# Altium PCB PCB1.PcbDoc (part 2 of 2)
Units mm, origin at the board's own origin, x right, y up, seen from the top; angles counter-clockwise.
Board outline 30.3 x 30 mm, 4 copper layers (Top Layer, Layer 1, Layer 2, Bottom Layer), stack 1.52 mm thick; 94 components, 80 nets, 362 pads, 126 vias.
Unrouted connection lines stored in the file: 75.
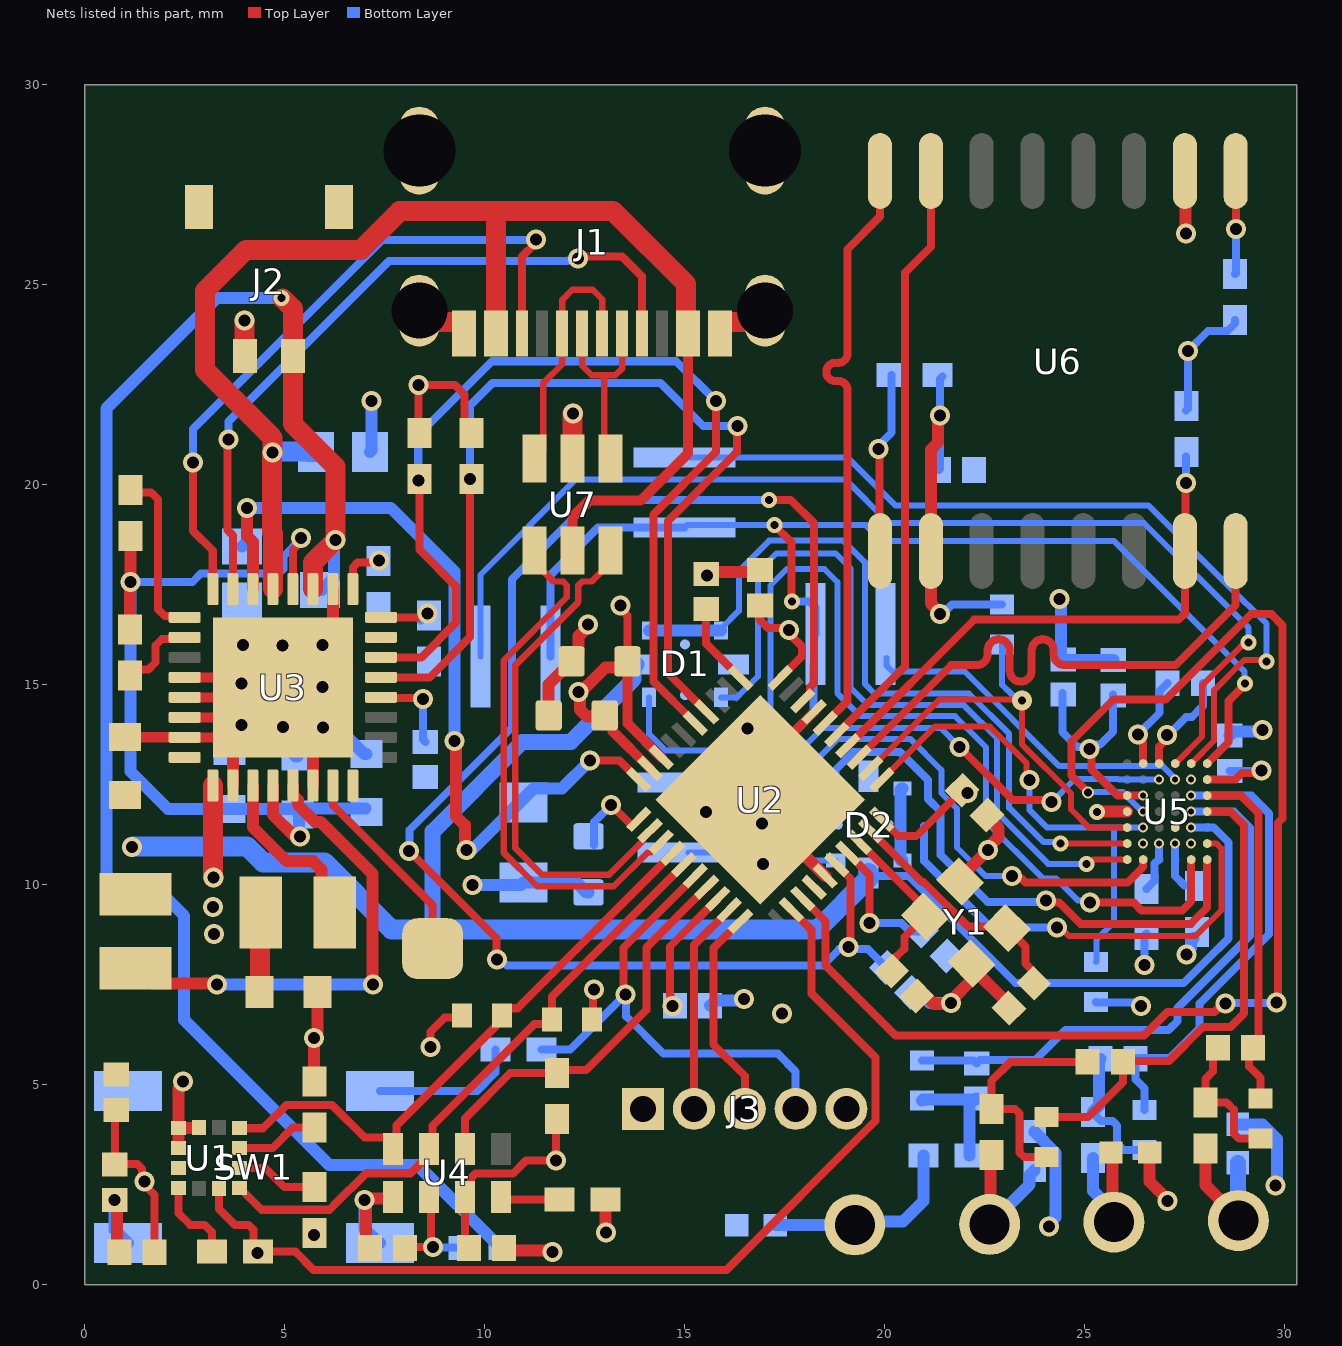
[diagram p4: the nets of this part, all layers, seen from the top]

## Via types
v1: diameter 0.5, hole 0.3, Top Layer to Bottom Layer, 101 vias
v2: diameter 0.25, hole 0.15, Top Layer to Bottom Layer, 13 vias
v3: diameter 0.4, hole 0.2, Top Layer to Bottom Layer, 10 vias
v4: diameter 0.5, hole 0.2, Top Layer to Bottom Layer, 1 vias
v5: diameter 0.3, hole 0.2, Top Layer to Bottom Layer, 1 vias

## Nets (pads, with @x,y where several pads share a name; then routed paths per layer and width w, separated by ;. In a path a pad name is that pad's centre, name@x,y a point inside that pad or via, vN(x,y) a via of type N, cw(c..) or ccw(c..) an arc to the next point about the centre after c; other vN are vias at no path point)
+1.8V_Acc: C1.2 C2.2 C3.1 C4.2 C5.2 C6.2 C7.2 C8.2 C9.2 C14.2 C16.2 C19.2 C21.2 C32.2 C33.2 C35.2 J3.1 L1.1 R4.1 R5.1 R11.2 R14.2 R15.2 R19.2 R20.2 R22.1 R24.1 R25.1 R26.2 R27.2 R28.2 U1.9 U1.10 U2.8 U2.9 U2.18 U2.30 U2.40 U3.1 U3.12 U4.7 U5.E5 U5.E6 U5.F1 U5.G4 U6.2 | length 65.9
  Top Layer w0.2: C1.2@0.785,4.372 0.753,4.34 C2.2@0.753,3.001 0.766,3.014 1.317,3.014 1.434,2.897 1.434,2.637 v1(1.492,2.579) 1.492,2.498 1.751,2.239 C3.1@1.751,0.809 ; U1.10@2.349,2.41 2.349,1.785 2.638,1.495 2.998,1.495 3.178,1.315 R14.2@3.178,0.826 ; U3.12@7.41,14.682 7.43,14.663 8.435,14.663 v1(8.454,14.643) ; R5.1@8.372,21.292 8.35,21.315 v1(8.35,22.488) 9.257,22.488 9.492,22.252 9.492,21.467 R4.1@9.666,21.294 ; v1(8.646,5.937) 8.646,6.321 8.999,6.674 9.377,6.674 R15.2@9.432,6.729 ; C32.2@9.607,0.915 9.505,1.018 U4.7@9.505,2.192 9.655,2.342 9.655,2.665 9.772,2.782 10.714,2.782 11.033,3.101 v1(11.781,3.101) 11.781,4.103 R24.1@11.815,4.136 ; R26.2@12.683,6.633 12.711,6.662 12.711,7.35 v1(12.74,7.378) ; v1(13.398,16.983) 13.398,16.901 13.571,16.728 C9.2@13.571,15.581 ; v1(14.699,6.971) 14.641,7.029 14.641,7.235 14.638,7.238 14.638,8.459 U2.18@15.831,9.651 ; C8.2@16.883,16.982 16.881,16.98 16.881,16.619 17.082,16.418 17.551,16.418 v1(17.608,16.361) 17.608,16.28 17.931,15.956 17.931,15.711 U2.40@17.386,15.166 ; U2.30@19.931,11.631 20.351,11.212 20.789,11.212 C21.2@21.937,12.36 22.01,12.36 v1(22.077,12.293) ; v1(25.117,13.387) 25.174,13.33 25.174,12.875 25.823,12.227 U5.E6@26.063,12.227 v2(26.463,12.227) ; U5.G4@26.863,13.027 26.863,13.457 27.064,13.658 v1(27.064,13.739) ; U5.F1@28.063,12.627 28.766,12.627 28.933,12.795 29.367,12.795 v1(29.424,12.852)
  Top Layer w0.254: C14.2@13.201,14.026 13.201,13.836 U2.9@14.134,12.903 ; C9.2@13.571,15.581 13.571,14.032 U2.8@14.417,13.186
  Top Layer w0.3: C14.2@13.201,14.026 13.028,14.2 12.559,14.2 12.383,14.376 12.383,14.777 v1(12.345,14.815) 12.399,14.815 12.544,14.961 12.553,14.961 13.018,15.425 13.416,15.425 C9.2@13.571,15.581 ; v1(21.378,21.726) 21.34,21.688 21.34,21.06 21.157,20.876 U6.2@21.157,18.341 21.157,17.029 21.386,16.8 v1(21.386,16.761)
  Top Layer w0.5: U3.1@3.205,12.477 3.205,10.188 v1(3.22,10.173) ; C19.2@4.372,7.322 4.387,7.338 4.387,9.293 L1.1@4.402,9.308
  Bottom Layer w0.2: v1(8.454,14.643) 8.454,13.63 C16.2@8.519,13.565 ; v1(14.699,6.971) C35.2@14.758,6.973 C35.2@14.758,6.973 ; C33.2@21.353,20.366 21.378,20.391 21.378,22.636 R19.2@21.446,22.703 ; v1(21.386,16.761) 21.44,16.761 21.683,17.004 R28.2@22.934,17.004 ; C5.2@24.449,14.796 24.449,13.81 24.815,13.445 25.06,13.445 v1(25.117,13.387) ; v1@25.099,13.405 25.216,13.405 25.31,13.499 25.383,13.499 25.707,13.823 C7.2@25.707,14.752 ; R27.2@25.28,7.061 25.286,7.054 26.267,7.054 26.358,6.963 v1(26.412,6.963) ; v1(26.5,7.986) 26.5,8.739 R11.2@26.545,8.783 ; v1(27.064,13.739) 27.089,13.739 27.536,14.186 27.678,14.186 27.956,14.463 C4.2@27.956,15.039 ; R20.2@27.539,21.859 27.582,21.901 v1(27.582,23.338) 28.079,23.835 28.565,23.835 28.765,24.035 R25.1@28.765,24.11 ; C6.2@28.626,12.847 29.419,12.847 v1(29.424,12.852)
  other v1: 5.73,1.244 3.24,8.76 3.214,9.445
+5V: C17.2 J1.A4-B9 J1.B4-A9 U3.21 U7.5 | length 34.6
  Top Layer w0.254: U7.5@12.2,18.35 12.2,19.2 12.6,19.6 13.9,19.6 15.087,20.787 J1.A4-B9@15.087,23.775 J1.A4-B9@15.037,23.825
  Top Layer w0.5: U3.21@4.705,17.387 4.705,18.779 4.684,18.8 4.684,20.784 v1(4.7,20.8) 4.7,21.172 3.003,22.869 3.003,24.842 4.031,25.87 6.91,25.87 7.876,26.837 10.287,26.837 ; J1.B4-A9@10.287,23.775 10.287,26.837 ; J1.A4-B9@15.037,23.825 15.037,25.014 13.215,26.837 10.287,26.837
  Bottom Layer w0.5: v1(4.7,20.8) 4.727,20.827 5.582,20.827 5.595,20.814 C17.2@5.782,20.814
BIOZ1: C29.1 R10.1 U5.D2 | length 14.1
  Bottom Layer w0.2: R10.1@20.94,5.606 22.225,5.606 C29.1@22.299,5.532 22.379,5.613 23.765,5.613 24.516,6.364 27.098,6.364 27.319,6.585 27.319,6.916 29.135,8.732 29.135,11.42 28.728,11.827 v2(27.663,11.827)
BIOZ2: C28.1 R9.1 U5.E2 | length 11.5
  Bottom Layer w0.2: R9.1@26.501,4.368 26.501,4.906 26.272,5.134 26.272,5.667 27.131,5.667 27.875,6.41 27.875,7.024 29.612,8.761 29.612,11.78 29.165,12.227 v2(27.663,12.227)
BIOZ3: C31.1 R16.1 U5.D1 | length 12.1
  Top Layer w0.2: R16.1@24.045,4.187 25.082,4.187 25.957,5.061 C31.1@25.957,5.569 25.977,5.589 27.106,5.589 27.952,6.435 27.961,6.435 27.969,6.443 28.646,6.443 28.982,6.78 28.982,11.486 28.641,11.827 U5.D1@28.063,11.827
BIOZ4: C30.1 R17.1 U5.E1 | length 8.8
  Top Layer w0.2: U5.E1@28.063,12.227 28.906,12.227 29.341,11.792 29.341,6.138 29.112,5.91 29.112,5.459 29.399,5.172 29.399,4.656 R17.1@29.4,4.655
CC1: J1.A5 U3.23 | length 18
  Top Layer w0.203: v1(3.594,21.132) 3.569,21.107 3.569,18.862 3.705,18.726 U3.23@3.705,17.387 ; v1(12.339,25.657) 12.39,25.708 13.438,25.708 13.937,25.208 J1.A5@13.937,23.775
  Bottom Layer w0.203: v1(3.594,21.132) 3.594,21.582 7.607,25.595 12.072,25.595 12.077,25.6 12.283,25.6 v1(12.339,25.657)
CC2: J1.B5 U3.24 | length 17.3
  Top Layer w0.203: v1(2.713,20.553) 2.713,18.84 3.203,18.35 3.203,17.39 U3.24@3.205,17.387 ; J1.B5@10.937,23.775 10.937,25.703 11.289,26.055 v1(11.289,26.135)
  Bottom Layer w0.203: v1(2.713,20.553) 2.713,21.389 7.44,26.117 11.271,26.117 v1(11.289,26.135)
DEC4_6: C20.2 U2.26 U2.38 | length 37.1
  Top Layer w0.2: v1(8.113,10.843) 10.291,8.665 v1@10.291,8.123 ; v3@17.081,19.621 17.649,19.621 18.231,19.039 18.231,15.033 18.129,14.931 18.129,14.778 U2.38@17.951,14.601 ; U2.26@18.8,10.5 18.8,10.497 19.152,10.145 19.152,8.584 19.094,8.526 v1(19.094,8.444)
  Bottom Layer w0.2: v1(8.113,10.843) 8.116,10.845 8.116,11.362 10.678,13.924 10.678,17.631 12.669,19.621 v3(17.105,19.621) ; v1(10.314,8.134) 10.395,8.134 10.555,7.974 18.452,7.974 18.865,8.387 19.036,8.387 v1(19.094,8.444) 19.151,8.387 19.585,8.387 20.042,7.931 C20.2@20.045,7.931
GND: C1.1 C2.1 C3.2 C4.1 C5.1 C6.1 C7.1 C8.1 C9.1 C10.1 C11.1 C14.1 C15.1 C16.1 C17.1 C18.1 C19.1 C20.1 C21.1 C22.1 C23.1 C24.1 C25.1 C26.1 C27.1 C32.1 C33.1 C34.1 C35.1 C36.1 C37.1 D5.1 D6.1 D7.1 D8.1 J1.1 J1.2 J1.3 J1.4 J1.A1-B12 J1.B1-A12 J2.2 J2.3 J2.4 J3.5 R3.2 R6.1 R7.1 R21.1 R23.1 SW1.3 SW1.4 U1.6 U1.7 U1.8 U2.25 U2.37 U2.41 U3.2 U3.6 U3.18 U3.28 U3.29 U3.30 U3.31 U3.33 U4.5 U5.B2 U5.B5 U5.D6 U5.F2 U5.G5 U6.10 U7.2 Y1.2 Y1.4 | length 69.8
  Top Layer w0.2: v1(26.336,13.759) 26.336,13.678 26.463,13.55 U5.G5@26.463,13.027
  Top Layer w0.254: C26.1@1.009,13.686 1.011,13.684 2.498,13.684 U3.31@2.5,13.682 U3.33@3.705,13.682 ; U3.30@2.5,14.182 3.332,14.182 U3.33@3.769,14.619 ; U3.29@2.5,14.682 U3.33@3.705,14.682 ; U3.28@2.5,15.182 U3.33@3.925,15.182 ; U2.41@16.891,12.126 16.891,12.975 U2.37@18.234,14.318
  Top Layer w0.3: v1(0.749,2.119) 0.812,2.055 0.812,0.868 C3.2@0.871,0.809 ; U1.8@2.349,3.41 U1.7@2.349,3.91 ; v1(2.459,5.082) 2.459,5.028 2.349,4.918 U1.7@2.349,3.91 ; U1.6@2.862,3.923 2.855,3.916 2.355,3.916 U1.7@2.349,3.91 ; U3.2@3.705,12.477 U3.33@3.705,13.682 ; U3.33@4.955,14.932 5.705,14.182 U3.6@5.705,12.477 ; R3.2@5.746,5.077 5.738,5.085 5.738,6.16 v1(5.729,6.169) 5.729,6.223 5.822,6.316 C19.1@5.822,7.322 ; U3.33@5.976,15.953 6.205,16.182 U3.18@6.205,17.387 ; C34.1@7.134,0.915 7.039,1.01 7.039,2.076 v1(7.001,2.115) 7.039,2.153 7.666,2.153 U4.5@7.705,2.192 ; C32.1@10.487,0.915 10.545,0.857 11.663,0.857 v1(11.701,0.819) ; C14.1@11.598,14.229 11.598,15.007 11.941,15.351 11.991,15.351 12.171,15.531 C9.1@12.171,15.581 12.352,15.761 12.352,16.217 12.58,16.445 v1(12.58,16.499) ; R23.1@13.025,2.13 13.027,2.128 v1(13.028,1.302) v1(13.028,1.302) ; v1(15.563,17.724) 15.563,17.744 C10.1@15.535,17.771 15.581,17.817 16.838,17.817 C8.1@16.883,17.862 ; U2.41@16.891,12.126 16.891,11.843 U2.25@18.517,10.217 ; C37.1@20.797,7.212 20.811,7.227 21.023,7.227 21.237,7.013 21.627,7.013 v1(21.655,7.04) 21.655,7.092 22.206,7.644 22.206,7.997 Y1.2@22.171,8.033 22.171,7.94 23.105,7.006 C36.1@23.105,6.913 ; Y1.4@21.888,10.083 21.888,10.172 v1(22.579,10.863) 22.579,10.917 22.846,11.184 22.846,11.422 22.559,11.708 C21.1@22.559,11.737 ; v3@25.309,11.827 U5.D6@26.063,11.827 ; D6.1@26.624,3.303 26.624,2.574 27.066,2.132 v1(27.066,2.087) ; U6.10@27.507,27.841 27.522,27.825 27.522,26.297 v1(27.537,26.282)
  Top Layer w0.5: v1(3.997,24.104) 3.997,23.225 J2.2@4.003,23.22 ; J1.2@8.367,24.35 8.367,24.293 8.598,24.063 9.437,24.063 9.487,24.013 J1.B1-A12@9.487,23.775 ; U7.2@12.2,20.65 12.2,21.776 v1(12.208,21.783) ; J1.A1-B12@15.887,23.775 15.887,24.013 15.937,24.063 16.776,24.063 17.007,24.293 J1.1@17.007,24.35
  Bottom Layer w0.2: v1(26.336,13.759) 26.876,14.299 26.876,14.839 C4.1@27.076,15.039
  Bottom Layer w0.254: v1@3.852,13.997 v1(3.919,13.997)
  Bottom Layer w0.3: v1(0.749,2.119) 0.749,1.374 SW1.3@1.08,1.043 ; C15.1@3.624,13.346 3.674,13.346 3.874,13.546 3.874,13.897 3.919,13.942 v1(3.919,13.997) ; v1(4.965,13.935) 5.003,13.897 5.003,13.527 5.075,13.455 5.075,13.405 5.275,13.205 C23.1@5.325,13.205 ; v1(5.961,13.93) 5.972,13.919 6.34,13.919 6.993,13.266 C24.1@7.043,13.266 ; v1(7.001,2.115) 7.001,1.393 7.351,1.043 SW1.4@7.38,1.043 ; C17.1@7.132,20.814 7.169,20.851 v1(7.169,22.087) ; v1(9.699,9.993) 10.909,9.993 C27.1@10.97,10.054 12.299,10.054 12.547,9.805 C11.1@12.597,9.805 ; C35.1@15.638,6.973 15.774,7.108 16.441,7.108 v1(16.479,7.146) ; C20.1@20.667,7.308 20.863,7.308 21.132,7.04 v1(21.655,7.04) ; D7.1@23.75,3.828 23.75,3.815 24.27,3.296 24.27,1.673 24.105,1.508 v1(24.105,1.454) ; v1(24.375,17.141) 24.413,17.103 24.413,15.685 C5.1@24.468,15.63 24.476,15.622 25.711,15.622 C7.1@25.72,15.614 ; v1(27.552,8.253) 27.552,8.307 27.665,8.42 27.665,8.604 R21.1@27.721,8.661 ; C6.1@28.626,13.727 28.723,13.824 29.411,13.824 v1(29.449,13.862) v1@29.442,13.869 ; D8.1@28.831,4.01 29.442,4.01 29.805,3.647 29.805,2.519 v1(29.766,2.481)
  other v1: 17.435,6.782 16.962,10.518 16.938,11.532 15.535,11.821 16.572,13.909 5.95,14.943 3.925,15.024 4.948,15.98 5.944,15.986 3.963,15.991
  other v2: 26.463,11.027 27.663,11.027 27.663,12.627
  other v3: 25.309,11.814
INT1_Acc: R14.1 U1.12 U2.22 | length 25.5
  Top Layer w0.2: U1.12@3.362,2.398 3.362,1.892 3.762,1.491 4.102,1.491 4.22,1.374 4.22,0.934 R14.1@4.328,0.826 5.266,0.826 5.723,0.369 16.043,0.369 19.769,4.095 19.769,5.68 18.169,7.281 18.169,8.869 U2.22@17.669,9.369
  other v1: 4.316,0.792
INT_AI: U2.23 U5.D5 | length 33.5
  Top Layer w0.2: U2.23@17.951,9.651 18.519,9.084 18.519,7.977 20.27,6.226 26.486,6.226 27.075,6.815 28.25,6.815 28.463,7.028 v1(28.517,7.028) ; v5(25.084,12.309) 24.667,12.726 24.667,13.574 25.717,14.623 27.019,14.623 29.156,16.76 29.668,16.76 29.948,16.48 29.948,11.66 29.83,11.541 29.83,7.077 v1(29.801,7.048)
  Bottom Layer w0.15: v5(25.084,12.309) 25.087,12.312 25.954,12.312 26.439,11.827 v2(26.463,11.827)
  Bottom Layer w0.2: v1(28.517,7.028) 28.527,7.038 29.791,7.038 v1(29.801,7.048)
INT_RTC: R24.2 U2.17 U4.2 | length 10.1
  Top Layer w0.2: U4.2@9.505,3.392 9.505,4.155 10.637,5.286 R24.2@11.815,5.286 11.89,5.361 12.535,5.361 14.046,6.872 14.046,8.432 U2.17@15.548,9.934
"LED1_ Green": D1.1 D1.7 D1.8 U5.B6 | length 19.5
  Top Layer w0.15: v3(24.392,11.027) U5.B6@26.063,11.027
  Bottom Layer w0.15: D1.7@15.91,16.35 15.91,16.4 16.354,16.844 16.354,17.842 17.113,18.601 18.966,18.601 19.505,18.063 19.505,15.018 19.743,14.78 22.104,14.78 23.114,13.77 23.114,11.922 23.967,11.068 24.351,11.068 v3(24.392,11.027)
  Bottom Layer w0.3: D1.1@14.11,16.35 D1.7@15.91,16.35
LED2_Red: D1.5 U5.A6 | length 19.3
  Top Layer w0.15: v3(25.046,10.519) 25.113,10.519 25.221,10.627 U5.A6@26.063,10.627
  Bottom Layer w0.15: D1.5@15.91,14.685 16.31,14.685 16.829,15.204 16.829,17.817 17.297,18.285 18.771,18.285 19.147,17.909 19.147,14.927 19.584,14.489 21.98,14.489 22.811,13.659 22.811,11.797 24.09,10.519 v3(25.046,10.519)
LED3_Red: D2.5 U5.A5 | length 14.8
  Top Layer w0.2: v1(23.179,10.212) 23.237,10.155 23.419,10.155 23.517,10.057 26.076,10.057 26.463,10.444 U5.A5@26.463,10.627
  Bottom Layer w0.15: D2.5@18.777,10.6 18.016,10.6 17.718,10.898 17.718,12.545 18.812,13.639 20.648,13.639 21.42,12.867 21.42,12.291 21.808,11.902 21.808,10.929 22.523,10.214 23.178,10.214 v1(23.179,10.212)
"LED5_ Green": D2.1 D2.7 D2.8 U5.B1 | length 13.2
  Top Layer w0.15: v1(24.313,8.929) 24.394,8.929 24.612,8.711 27.768,8.711 28.421,9.364 28.421,10.902 28.3,11.023 28.067,11.023 U5.B1@28.063,11.027
  Bottom Layer w0.2: 20.989,11.469 20.989,10.588 22.648,8.929 v1(24.313,8.929)
  Bottom Layer w0.3: 20.396,12.092 20.396,12.082 ; D2.7@20.442,10.6 20.421,10.6 20.396,10.625 20.396,12.082 ; D2.1@20.442,12.4 20.421,12.4 20.396,12.375 20.396,12.082
LED6_IR: D1.3 U5.A2 | length 26
  Top Layer w0.2: v1(25.135,9.549) 26.231,9.549 26.424,9.356 27.439,9.356 27.663,9.581 U5.A2@27.663,10.627
  Bottom Layer w0.15: D1.3@14.11,14.685 14.11,13.77 14.522,13.358 16.674,13.358 17.147,13.831 17.147,17.482 17.556,17.892 18.492,17.892 18.819,17.566 18.819,14.786 19.395,14.21 21.758,14.21 22.534,13.434 22.534,11.572 23.949,10.157 24.278,10.157 24.829,9.607 25.077,9.607 v1(25.135,9.549)
LED7_IR: D2.3 U5.A1 | length 14
  Top Layer w0.2: v1(24.037,9.607) 24.087,9.557 24.365,9.557 24.9,9.022 27.655,9.022 28.063,9.43 U5.A1@28.063,10.627
  Bottom Layer w0.2: D2.3@18.777,12.4 18.777,12.872 19.224,13.319 20.384,13.319 21.085,12.618 21.085,12.14 21.402,11.823 21.402,10.738 22.567,9.572 24.003,9.572 v1(24.037,9.607)
NetA1_S: 
NetC10_2: C10.2 U2.1 | length 2.1
  Top Layer w0.203: C10.2@15.535,16.891 15.535,16.027 U2.1@16.397,15.166
NetC11_2: C11.2 U2.11 | length 2.2
  Top Layer w0.203: v1(13.164,11.994) 13.689,11.47 U2.11@13.851,11.631
  Bottom Layer w0.2: C11.2@12.731,10.993 12.731,11.561 v1(13.164,11.994)
NetC12_2: U2.24
NetC13_2: 
NetC22_2: C22.2 U2.27 | length 3.4
  Top Layer w0.2: U2.27@19.083,10.783 19.625,10.241 v1(19.625,9.037)
  Bottom Layer w0.2: v1(19.625,9.037) 20.421,9.037 20.632,8.827 20.915,8.827 C22.2@20.929,8.841
NetC28_2: C28.2 R1.1 R9.2 | length 3.4
  Bottom Layer w0.2: R1.1@25.21,4.321 25.21,4.295 25.41,4.095 25.696,4.095 25.813,3.978 25.813,3.529 25.974,3.368 R9.2@26.501,3.368
  Bottom Layer w0.3: R1.1@25.21,4.321 25.358,4.469 25.358,5.613 C28.2@25.392,5.647
NetC29_2: C29.2 R2.1 R10.2 | length 2.6
  Bottom Layer w0.3: R10.2@20.94,4.606 20.963,4.629 22.275,4.629 C29.2@22.299,4.652 ; R2.1@22.124,3.227 C29.2@22.124,4.478
NetC30_2: C30.2 R13.1 R17.2 | length 3.6
  Top Layer w0.2: C30.2@28.209,5.933 28.209,5.333 28.021,5.145 R13.1@28.021,4.557 28.545,4.557 28.729,4.374 28.729,3.78 28.853,3.655 R17.2@29.4,3.655
NetC31_2: C31.2 R12.1 R16.2 | length 5.8
  Top Layer w0.2: R16.2@24.045,3.187 23.489,3.187 23.372,3.304 23.372,4.279 23.255,4.397 R12.1@22.667,4.397 22.667,5.091 23.145,5.569 C31.2@25.077,5.569
NetC34_2: C34.2 R18.2 U4.6 | length 2.6
  Top Layer w0.203: C34.2@8.014,0.915 8.041,0.943 v1(8.714,0.943) 8.66,0.998 8.66,2.137 U4.6@8.605,2.192
  Bottom Layer w0.203: v1(8.714,0.943) 8.727,0.931 9.333,0.931 R18.2@9.345,0.919
NetC36_2: C36.2 U2.29 Y1.3 | length 6.1
  Top Layer w0.2: U2.29@19.649,11.349 20.936,10.061 20.977,10.061 22.086,8.952 23.02,8.952 Y1.3@23.055,8.916 23.52,8.452 23.52,8.026 23.727,7.818 C36.2@23.727,7.535
NetC37_2: C37.2 U2.28 Y1.1 | length 4.3
  Top Layer w0.2: U2.28@19.366,11.066 21.004,9.427 Y1.1@21.004,9.199 20.491,8.685 20.491,8.396 20.175,8.08 C37.2@20.175,7.835
NetD3_2: D3.2 U3.25 | length 4.3
  Top Layer w0.2: D3.2@1.14,19.868 1.198,19.81 1.659,19.81 1.839,19.63 1.839,16.881 2.003,16.717 2.465,16.717 U3.25@2.5,16.682
NetD4_2: D4.2 U3.26 | length 2
  Top Layer w0.2: D4.2@1.133,15.233 1.276,15.375 1.593,15.375 1.766,15.548 1.766,15.975 1.939,16.147 2.465,16.147 U3.26@2.5,16.182
NetD5_2: D5.2 R2.2 TP4.1 | length 5.1
  Bottom Layer w0.3: D5.2@17.268,1.486 17.273,1.491 19.248,1.491 TP4.1@19.253,1.495 19.341,1.583 20.465,1.583 20.977,2.095 20.977,3.225 R2.2@20.974,3.227
NetD6_2: D6.2 R1.2 TP5.1 | length 3.6
  Top Layer w0.3: D6.2@25.659,3.303 25.694,3.268 25.694,1.598 TP5.1@25.729,1.563
  Bottom Layer w0.3: R1.2@25.21,3.171 25.21,2.346 25.729,1.826 TP5.1@25.729,1.563
NetD7_2: D7.2 R12.2 TP7.1 | length 3.6
  Top Layer w0.3: TP7.1@22.627,1.505 22.647,1.526 22.647,3.226 R12.2@22.667,3.247
  Bottom Layer w0.3: TP7.1@22.627,1.505 23.621,2.5 23.621,2.733 D7.2@23.75,2.863
NetD8_2: D8.2 R13.2 TP6.1 | length 3.6
  Top Layer w0.3: R13.2@28.021,3.407 28.021,2.488 28.842,1.667 TP6.1@28.842,1.595
  Bottom Layer w0.4: D8.2@28.831,3.044 28.837,3.039 28.837,1.601 TP6.1@28.842,1.595
NetL1_2: L1.2 U3.3 | length 4.4
  Top Layer w0.3: U3.3@4.205,12.477 4.205,11.438 5.057,10.587 5.709,10.587 5.919,10.377 5.919,9.64 L1.2@6.251,9.308
NetL2_2: L2.2 U3.5 | length 12
  Top Layer w0.3: L2.2@1.275,7.911 1.656,7.53 3.287,7.53 v1(3.314,7.503) ; U3.5@5.205,12.477 5.205,12.242 5.33,12.117 5.33,11.998 5.763,11.565 5.901,11.565 7.196,10.27 7.196,7.516 v1(7.214,7.499)
  Bottom Layer w0.3: v1(3.314,7.503) 3.317,7.501 7.211,7.501 v1(7.214,7.499)
NetR3_1: R3.1 U1.3 | length 2.1
  Top Layer w0.2: U1.3@3.874,3.41 4.696,3.41 5.212,3.927 R3.1@5.746,3.927
NetR6_2: R6.2 U3.17 | length 1.3
  Top Layer w0.2: U3.17@6.705,17.387 6.705,17.934 6.823,18.051 7.297,18.051 v1(7.355,18.108)
  Bottom Layer w0.2: R6.2@7.344,18.094 7.344,18.097 v1(7.355,18.108)
NetR7_2: R7.2 U3.16 | length 1.6
  Top Layer w0.2: U3.16@7.41,16.682 8.387,16.682 8.487,16.783 v1(8.568,16.783)
  Bottom Layer w0.2: R7.2@8.393,16.606 8.411,16.606 8.632,16.827 8.588,16.783 v1(8.568,16.783)
NetR8_1: R8.1 SW1.1 SW1.2 | length 3.7
  Bottom Layer w0.2: SW1.2@7.38,4.843 9.809,4.843 10.266,5.299 R8.1@10.266,5.879
NetR11_1: R11.1 U5.B4 | length 1.3
  Bottom Layer w0.2: R11.1@26.547,9.896 26.747,10.096 26.747,10.527 26.854,10.634 26.854,11.017 v2(26.863,11.027)
NetR19_1: R19.1 U6.1 | length 4.5
  Top Layer w0.2: v1(19.844,20.891) 19.865,20.87 19.865,18.362 U6.1@19.887,18.341
  Bottom Layer w0.2: v1(19.844,20.891) 19.844,20.972 20.17,21.298 R19.1@20.17,22.735
NetR21_2: R21.2 U5.B3 | length 1.1
  Bottom Layer w0.2: v2@27.263,11.013 27.263,10.212 27.493,9.982
  other v2: 27.263,11.027
NetR22_2: R22.2 U1.2 | length 2.1
  Top Layer w0.2: U1.2@3.874,2.91 4.522,2.91 4.992,2.439 R22.2@5.746,2.439
NetR23_2: R23.2 U4.8 | length 1.5
  Top Layer w0.2: U4.8@10.405,2.192 10.467,2.13 R23.2@11.875,2.13
NetR25_2: R25.2 U6.9 | length 2.6
  Top Layer w0.2: U6.9@28.777,27.841 28.779,27.838 28.779,26.388 v1(28.782,26.385)
  Bottom Layer w0.2: R25.2@28.765,25.26 28.782,25.278 v1(28.782,26.385)
NetTP1_1: U3.15
NetTP2_1: TP2.1 U3.7 | length 5.1
  Top Layer w0.2: U3.7@6.205,12.477 6.212,12.471 6.212,11.983 8.7,9.495 TP2.1@8.7,8.4
NetTP3_1: U3.8
NetTP_1: U5.C3
nRESET: J3.4 R8.2 U2.16 | length 12.7
  Top Layer w0.2: v1(13.519,7.26) 13.469,7.31 13.469,8.421 U2.16@15.265,10.217
  Bottom Layer w0.2: R8.2@11.416,5.879 12.138,5.879 v1(13.519,7.26) 13.538,7.241 13.538,6.71 14.474,5.774 17.332,5.774 17.774,5.332 J3.4@17.774,4.395
PD2: D9.1 U5.G3 | length 28
  Top Layer w0.15: U5.G3@27.263,13.027 27.939,13.703 27.939,14.987 28.902,15.951 28.931,15.951 29.033,16.053 v3(29.101,16.053)
  Bottom Layer w0.15: D9.1@9.895,15.706 9.895,17.745 12.28,20.131 19.011,20.131 20.101,19.041 26.48,19.041 29.101,16.42 v3(29.101,16.053)
PD3: D10.1 U5.G2 | length 20.9
  Top Layer w0.15: U5.G2@27.663,13.027 28.239,13.602 28.239,14.863 28.991,15.615 29.517,15.615 v3(29.548,15.584)
  Bottom Layer w0.15: D10.1@15,20.675 19.075,20.675 20.268,19.483 26.586,19.483 28.57,17.499 29.548,16.52 v3(29.548,15.584)
PD5: D11.1 U5.F3 | length 8.6
  Bottom Layer w0.15: D11.1@20.042,15.672 20.042,15.481 20.193,15.33 21.999,15.33 24.366,12.963 24.94,12.963 24.941,12.962 25.293,12.962 25.294,12.963 26.951,12.963 27.263,12.651 v2(27.263,12.627)
PD7: D12.1 U5.F4 | length 14.3
  Top Layer w0.2: v1(21.867,13.447) 23.194,12.12 24.115,12.12 v1(24.173,12.063)
  Bottom Layer w0.15: D12.1@15.1,10.8 15.687,10.8 15.837,10.95 15.837,11.298 18.458,13.919 21.396,13.919 v1(21.867,13.447) ; v1(24.173,12.063) 24.747,12.637 25.833,12.637 25.843,12.627 v2(26.863,12.627)
PDREF: D9.2 D10.2 D11.2 D12.2 U5.G1 | length 32.6
  Top Layer w0.2: v3(17.242,18.988) 17.242,18.987 17.666,18.563 17.666,17.093 v3(17.684,17.074) ; U5.G1@28.063,13.027 28.598,13.561 28.598,14.591 29.008,15.001 v3(29.008,15.029)
  Bottom Layer w0.15: D10.2@15,18.925 15.063,18.988 v3(17.242,18.988) 19.528,18.988 19.921,18.595 25.731,18.595 29.002,15.324 29.002,15.035 v3(29.008,15.029)
  Bottom Layer w0.2: D9.2@11.645,15.706 11.645,17.74 12.83,18.925 D10.2@15,18.925 ; D12.2@15.1,12.55 15.19,12.64 16.558,12.64 18.225,14.307 D11.2@18.225,15.5 ; v3(17.684,17.074) 18.118,17.074 18.268,16.924 D11.2@18.268,16.263
SCL_Acc: R26.1 U1.1 U2.15 U4.3 | length 15.6
  Top Layer w0.203: U1.1@3.874,2.41 3.887,2.41 4.424,1.873 6.126,1.873 6.238,1.985 6.238,1.99 7.031,2.784 8.147,2.784 8.605,3.242 U4.3@8.605,3.392 8.699,3.486 8.699,3.972 11.247,6.52 11.57,6.52 R26.1@11.683,6.633 11.683,7.201 U2.15@14.982,10.5
SCL_AI: R28.1 U2.32 U5.C6 | length 11
  Top Layer w0.15: U2.32@19.649,12.903 21.368,14.623 v4@23.293,14.623 ; v4@23.321,14.605 v4(23.429,14.605) 23.429,13.512 24.66,12.28 24.66,11.88 25.114,11.427 U5.C6@26.063,11.427
  Bottom Layer w0.15: R28.1@22.934,16.004 22.934,14.996 23.046,14.884 23.055,14.884 23.334,14.605 v4(23.429,14.605)
SCL_PM: R5.2 U2.5 U3.14 | length 25.1
  Top Layer w0.2: U2.5@15.265,14.035 14.22,15.08 14.22,19.258 15.783,20.821 v1(15.783,22.09)
  Top Layer w0.203: U3.14@7.41,15.682 8.417,15.682 9.286,16.551 9.286,17.456 8.367,18.374 R5.2@8.367,20.137
  Bottom Layer w0.203: v1(8.341,20.105) 8.341,21.241 10.185,23.085 14.788,23.085 v1(15.783,22.09)
SDA_Acc: R15.1 U1.4 U2.14 U4.4 | length 14.9
  Top Layer w0.203: U1.4@3.874,3.91 4.462,3.91 5.045,4.493 6.185,4.493 7.003,3.676 7.601,3.676 7.795,3.482 7.795,3.977 10.283,6.465 10.283,6.581 R15.1@10.432,6.729 10.432,6.761 10.58,6.909 10.826,6.909 U2.14@14.699,10.783
SDA_MOSI_AI: R27.1 U2.31 U5.C5 | length 12.3
  Top Layer w0.15: U2.31@19.931,12.621 19.931,12.627 21.256,13.952 22.633,13.952 23.552,13.032 23.552,12.679 v1(23.619,12.612)
  Bottom Layer w0.15: v1(23.619,12.612) 23.619,11.87 24.063,11.427 25.7,11.427 ; R27.1@25.28,8.061 25.294,8.076 25.294,8.62 25.733,9.059 25.733,11.394 25.7,11.427 ; v2(26.463,11.427) 25.7,11.427
SDA_PM: R4.2 U2.4 U3.13 | length 24.1
  Top Layer w0.2: U2.4@15.548,14.318 14.58,15.285 14.58,19.093 16.303,20.816 16.303,21.45 v1(16.319,21.466)
  Top Layer w0.203: U3.13@7.41,15.182 8.627,15.182 9.637,16.193 v1(9.637,20.139)
  Bottom Layer w0.203: v1(9.637,20.139) 9.637,21.979 10.196,22.538 14.395,22.538 15.466,21.466 v1(16.319,21.466)
SPI_CLK_mem: U2.36 U6.16 | length 15
  Top Layer w0.2: U2.36@18.517,14.035 18.517,14.038 19.069,14.59 19.069,22.266 19.069,22.366 ccw(c18.842,22.366) 18.842,22.593 18.768,22.593 cw(c18.768,22.82) 18.768,23.047 18.842,23.047 ccw(c18.842,23.274) 19.069,23.274 19.069,24.122 19.069,25.883 19.887,26.701 U6.16@19.887,27.841
SPI_CS_mem: R20.1 U2.34 U6.7 | length 13.7
  Top Layer w0.2: U2.34@19.083,13.469 22.238,16.624 27.351,16.624 27.507,16.779 U6.7@27.507,18.341 27.52,18.354 27.52,20.031 v1(27.534,20.044)
  Bottom Layer w0.2: v1(27.534,20.044) 27.534,20.703 R20.1@27.539,20.709
SPI_MISO_mem: U2.33 U6.8 | length 14.8
  Top Layer w0.2: U2.33@19.366,13.186 21.665,15.486 22.202,15.486 22.302,15.486 ccw(c22.302,15.761) 22.577,15.761 22.577,15.86 cw(c22.852,15.86) 22.852,16.135 cw(c22.852,15.86) 23.127,15.86 23.127,15.351 ccw(c23.402,15.351) 23.402,15.076 ccw(c23.402,15.351) 23.677,15.351 23.677,15.86 cw(c23.952,15.86) 23.952,16.135 cw(c23.952,15.86) 24.227,15.86 24.227,15.761 ccw(c24.502,15.761) 24.502,15.486 25.882,15.486 27.272,15.486 28.777,16.99 U6.8@28.777,18.341
SPI_MOSI_mem: U2.35 U6.15 | length 15.1
  Top Layer w0.2: U2.35@18.8,13.752 20.506,15.458 20.506,25.3 21.157,25.95 U6.15@21.157,27.841
SWDCLK: J3.3 U2.20 | length 5.3
  Top Layer w0.2: U2.20@16.397,9.086 15.725,8.414 15.725,6 16.504,5.22 J3.3@16.504,4.395
SWDIO: J3.2 U2.19 | length 5.3
  Top Layer w0.2: J3.2@15.234,4.395 15.234,8.489 U2.19@16.114,9.369
USB_CON_N: J1.A7 J1.B7 U7.1 | length 5
  Top Layer w0.161: J1.A7@12.437,23.775 12.437,22.975 12.681,22.731 12.985,22.731 ; U7.1@13.15,20.65 12.985,20.815 12.985,22.731 ; J1.B7@13.437,23.775 13.437,22.902 13.267,22.731 12.985,22.731
USB_CON_P: J1.A6 J1.B6 U7.3 | length 6.3
  Top Layer w0.161: U7.3@11.25,20.65 11.469,20.869 11.469,22.545 11.937,23.013 11.937,24.618 12.189,24.869 12.7,24.869 12.937,24.632 J1.A6@12.937,23.775
USB_D+: U2.13 U7.4 | length 13.3
  Top Layer w0.161: U7.4@11.25,18.35 11.25,18.05 11.721,17.579 11.962,17.579 12.056,17.485 12.056,17.187 10.482,15.613 10.482,10.792 11.316,9.958 13.23,9.958 14.075,10.804 14.155,10.804 ; U2.13@14.239,10.888 U2.13@14.417,11.066
USB_D-: U2.12 U7.6 | length 12.5
  Top Layer w0.161: U7.6@13.15,18.35 13.15,18.05 12.679,17.579 12.438,17.579 12.344,17.485 12.344,17.068 10.77,15.494 10.77,10.911 11.435,10.246 13.11,10.246 13.956,11.092 U2.12@13.956,11.171
V_LED: C26.2 D1.2 D1.4 D1.6 D2.2 D2.4 D2.6 L2.1 U3.32 U5.C2 | length 43.2
  Bottom Layer w0.2: 19.871,10.22 20.592,10.22 23.276,7.536 27.471,7.536 28.038,8.103 28.04,8.103 28.594,8.657 28.594,11.058 28.226,11.427 v2(27.663,11.427)
  Bottom Layer w0.4: 8.7,8.844 8.7,11.324 10.946,13.571 12.157,13.571 13.724,15.138 13.724,15.45 13.774,15.5 D1.2@13.8,15.5
  Bottom Layer w0.5: v1(1.181,10.938) 1.202,10.959 4.061,10.959 4.46,10.56 5.993,10.56 7.673,8.88 8.663,8.88 ; 8.7,8.88 18.322,8.88 19.592,10.15 D2.6@19.592,10.29
VBAT: C18.2 J2.1 R18.1 U3.19 | length 41.9
  Top Layer w0.5: v3@4.946,24.659 5.203,24.402 J2.1@5.203,23.22 5.203,21.518 6.27,20.451 v1(6.27,18.615) 5.705,18.05 U3.19@5.705,17.387
  Bottom Layer w0.3: v3(4.915,24.667) 3.303,24.667 0.545,21.909 0.545,10.251 0.901,9.896 1.813,9.896 2.488,9.221 2.488,6.616 6.112,2.992 8.322,2.992 10.345,0.969 R18.1@10.345,0.919 ; C18.2@5.884,17.372 5.934,17.372 6.234,17.672 6.234,18.579 v1(6.27,18.615)
VBUSOUT: C25.2 C27.2 U2.10 U3.22 | length 21.5
  Top Layer w0.203: v1(12.628,13.101) 13.37,13.101 U2.10@13.851,12.621
  Top Layer w0.3: v1(4.054,19.422) 4.057,19.418 4.057,18.72 4.205,18.572 U3.22@4.205,17.387 ; v1(9.25,13.595) 9.282,13.562 9.282,11.71 9.506,11.486 9.506,10.898 v1(9.544,10.86)
  Bottom Layer w0.3: C25.2@3.939,18.452 4.054,18.567 v1(4.054,19.422) 7.652,19.422 9.25,17.823 v1(9.25,13.595) ; v1(9.544,10.86) 9.582,10.898 9.715,10.898 11.22,12.404 11.93,12.404 v1(12.628,13.101)
VSYS: C15.2 C23.2 C24.2 D3.1 D4.1 U3.4 U3.20 | length 22
  Top Layer w0.2: U3.20@5.205,17.387 5.205,18.373 5.412,18.58 v1(5.412,18.661)
  Top Layer w0.3: D4.1@1.133,16.383 1.137,16.386 1.137,17.569 v1(1.14,17.572) D3.1@1.14,18.718 ; U3.4@4.705,12.477 4.705,11.751 5.21,11.246 5.35,11.246 v1(5.388,11.208)
  Bottom Layer w0.2: v1(1.14,17.572) 2.7,17.572 2.903,17.775 4.85,17.775 4.967,17.892 4.967,18.196 5.412,18.64 v1(5.412,18.661)
  Bottom Layer w0.3: v1(1.14,17.572) 1.14,12.833 2.078,11.896 C15.2@3.624,11.896 ; C15.2@3.624,11.896 C23.2@5.325,11.895 ; v1(5.388,11.208) 5.357,11.239 5.357,11.863 C23.2@5.325,11.895 ; C24.2@7.02,11.902 5.332,11.902 C23.2@5.325,11.895
pads on no net: J1.A8 J1.B8 U1.5 U1.11 U2.2 U2.3 U2.6 U2.7 U2.21 U2.39 U3.9 U3.10 U3.11 U3.27 U4.1 U5.A3 U5.A4 U5.C1 U5.C4 U5.D3 U5.D4 U5.E3 U5.E4 U5.F5 U5.F6 U5.G6 U6.3 U6.4 U6.5 U6.6 U6.11 U6.12 U6.13 U6.14

## Polygon pours and split planes (outlines as drawn)
GND on Bottom Layer "GND_L04_P000" (solid, pour order 0): 30.3,30 0,30 0,0 30.3,0
GND on Layer 1 "GND_L02_P002" (solid, pour order 2): 0,30 30.3,30 30.3,0.05 0,0
+1.8V_Acc on Layer 2 "+1.8V_ACC_L03_P006" (solid, pour order 6): 0,30 30.3,30 30.3,0 30,0 0,0
GND on Top Layer "GND_L01_P005" (solid, pour order 5): 30.3,30 0,30 0,0 30.3,0

## Other copper
Top Layer:
  region net +1.8V_Acc: 2.57,2.227 1.496,2.227 1.496,2.923 1.957,2.923 2.137,3.103 2.57,3.103
  region net +1.8V_Acc: 2.955,10.476 2.955,8.494 4.819,8.494 4.819,8.505 4.819,9.929 4.819,10.019 4.718,10.019 3.802,10.019 3.39,10.476
  region net V_LED: 2.079,13.341 2.079,13.34 2.896,13.34 2.896,13.033 2.893,13.03 2.129,13.03 1.517,12.179 1.517,11.002 2.149,10.37 2.149,9.463 0.314,9.463 0.317,9.466 0.317,12.702 0.555,12.94 1.101,12.94
Bottom Layer:
  region net V_LED: 19.87,10.104 19.873,10.108 19.873,10.787 19.593,10.787 19.261,11.118 19.261,11.91 19.593,12.242 19.861,12.242 19.861,13.119 19.858,13.116 19.303,13.116 19.303,12.309 18.993,11.998 18.545,11.998 18.542,11.995 18.542,11.061 18.548,11.054 18.92,11.054 19.346,10.628 19.346,10.108 19.343,10.104
  region net V_LED: 16.435,15.774 16.432,15.777 15.753,15.777 15.753,15.497 15.421,15.165 14.629,15.165 14.297,15.497 14.297,15.765 13.421,15.765 13.424,15.762 13.424,15.208 14.23,15.208 14.541,14.897 14.541,14.45 14.544,14.447 15.479,14.447 15.485,14.453 15.485,14.824 15.911,15.25 16.432,15.25 16.435,15.247

## Silkscreen, mask and mechanical layers (free items; w line width, h text height)
Top Component Center:
  lines w0.254: 2.999,16.128 3.143,16.128

## Text inside footprints (layer, text, board x,y; h text height)
U2: Mechanical 13 "*" at 16.114,14.833 h1.27 r315